# Altium PCB TXW827-RGB888_GQ_XC001 V2.0.PcbDoc (part 2 of 2)
Units mm, origin at the board's own origin, x right, y up, seen from the top; angles counter-clockwise.
Board outline 100 x 93.19 mm, 2 copper layers (Top Layer, Bottom Layer); 214 components, 136 nets, 624 pads, 441 vias.
Unrouted connection lines stored in the file: 170.
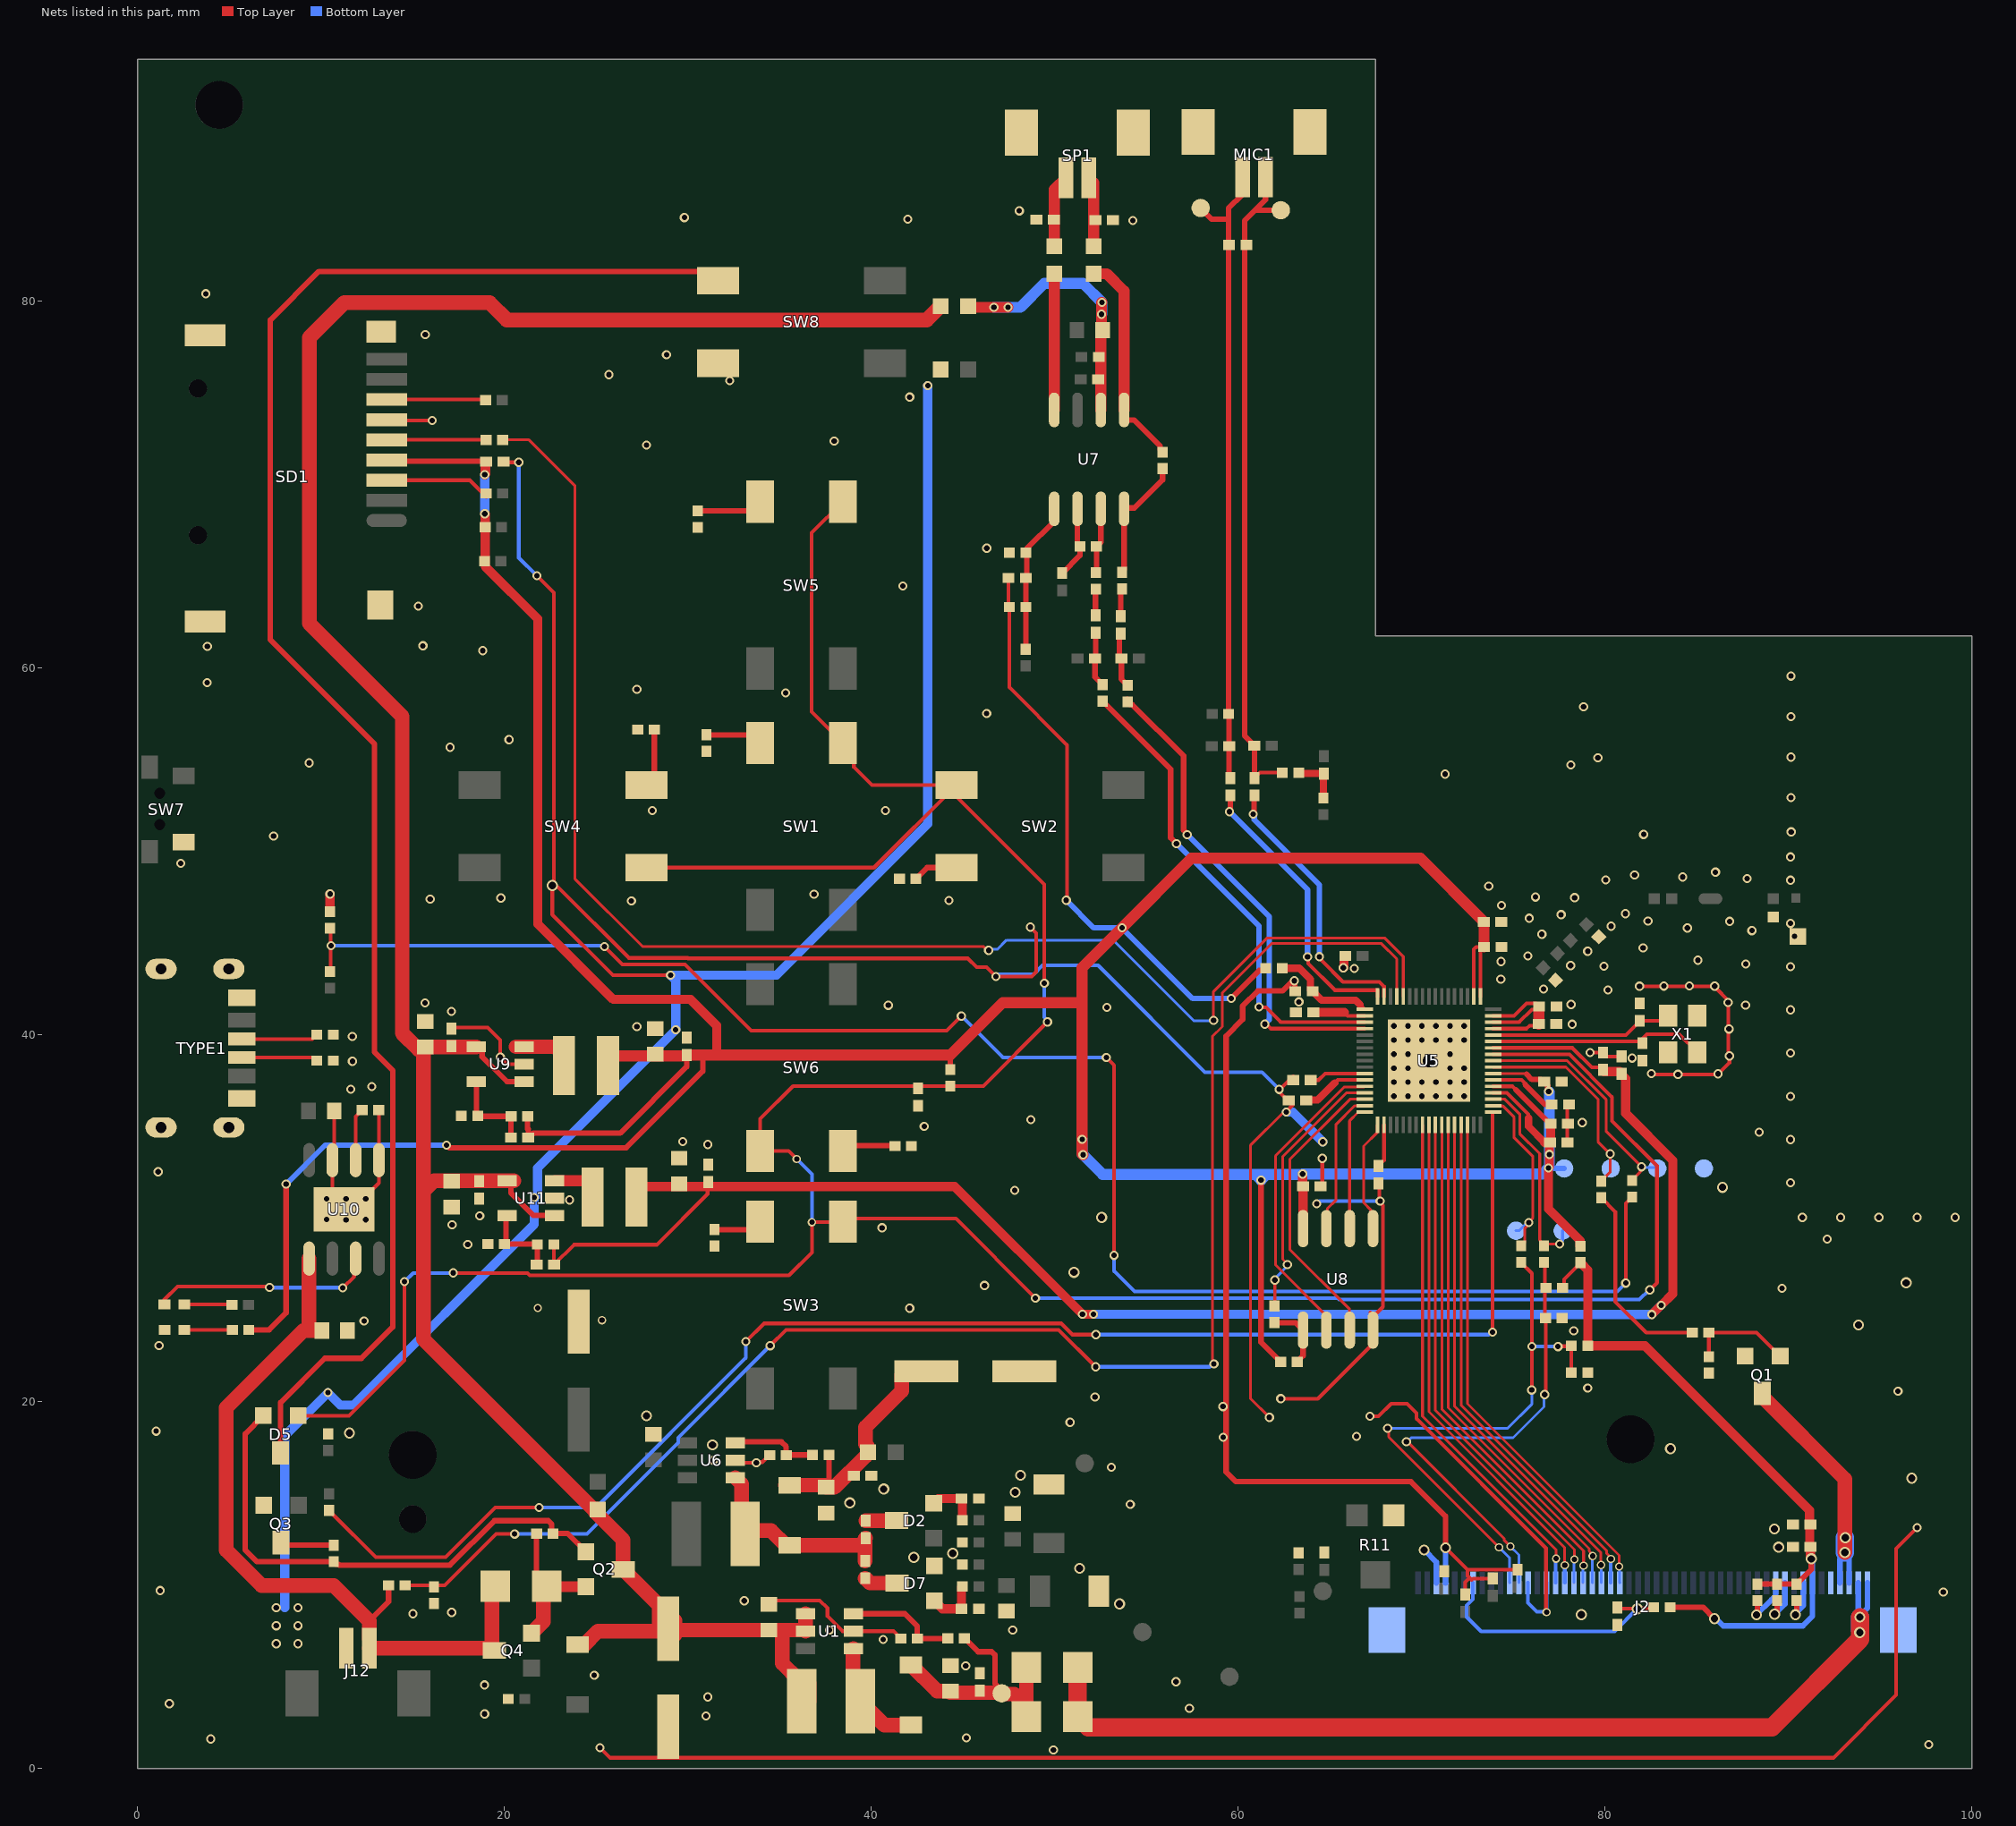
[diagram p2: the nets of this part, all layers, seen from the top]

## Via types
v1: diameter 0.5, hole 0.3, Top Layer to Bottom Layer, tented both sides, 376 vias
v2: diameter 0.6, hole 0.4, Top Layer to Bottom Layer, tented both sides, 42 vias
v3: diameter 0.45, hole 0.3, Top Layer to Bottom Layer, tented both sides, 23 vias

## Nets (pads, with @x,y where several pads share a name; then routed paths per layer and width w, separated by ;. In a path a pad name is that pad's centre, name@x,y a point inside that pad or via, vN(x,y) a via of type N, cw(c..) or ccw(c..) an arc to the next point about the centre after c; other vN are vias at no path point) (continued)
GND: C1.2 C2.1 C3.2 C5.2 C6.1 C8.2 C9.2 C10.2 C11.2 C12.2 C13.1 C14.2 C15.2 C17.1 C18.1 C19.2 C20.1 C21.2 C22.2 C23.2 C24.2 C25.2 C26.2 C27.2 C28.2 C29.2 C41.2 C45.2 C46.2 C47.2 C48.2 C49.2 C50.2 C51.2 C52.2 C53.2 C54.2 C55.2 C56.2 C57.2 C58.2 C59.2 C60.2 C61.1 C62.2 C64.1 C65.2 C66.1 C67.1 C68.2 C70.1 C71.2 C72.2 CB1.1 CB2.1 CC1.2 D6.2 D7.2 D8.1 J2.5 J2.36 J2.38 J2.47 J2.48 J2.51 J2.52 J10.1 J12.1 L4.1 L6.1 LED1.2 MIC1.3 MIC1.4 pad.2 Q1.2 Q3.2 R3.1 R6.2 R11.1 R18.2 R19.2 R23.1 R25.1 R27.1 R29.1 R30.1 R33.1 R35.1 R37.1 R40.1 R57.2 R58.1 R59.1 R61.1 R62.1 R64.1 R67.1 R68.1 R69.2 R71.1 R73.1 RF1.2 SD1.6 SD1.10 SD1.11 SD1.12 SD1.13 SP1.3 SP1.4 SW7.2 SW8.3 TYPE1.1 TYPE1.2 TYPE1.3 TYPE1.4 TYPE1.GND U1.2 U5.69 U6.2 U8.4 U9.2 U10.1 U10.3 U10.9 U11.2 X1.2 X1.4 | length 420.4
  Top Layer w0.15: v1(61.697,19.134) 60.655,20.176 60.655,33.958 62.479,35.782 v1(62.61,35.782)
  Top Layer w0.2: C66.1@10.711,35.85 10.711,33.257 U10.3@10.611,33.157 10.611,31.11 U10.9@11.246,30.475 11.711,30.475 12.357,31.121 12.357,31.136 12.796,31.575 12.811,31.575 13.151,31.915 U10.1@13.151,33.157 R61.1@13.151,35.885 ; SD1.6@14.09,73.503 14.099,73.494 v1(16.059,73.494) ; C62.2@17.035,40.389 19.082,40.389 19.769,39.703 v1(19.768,38.769) 20.145,38.393 U9.2@21.061,38.393 ; C61.1@19.922,71.198 19.936,71.213 v1(20.774,71.213) ; v1(21.763,65.023) 22.689,64.096 22.689,48.449 22.678,48.438 22.678,48.209 v2(22.602,48.132) ; v1(25.201,1.122) 25.752,0.572 92.448,0.572 95.869,3.994 95.869,11.985 v1(97.011,13.127) ; v1(29.046,43.246) 25.905,43.246 22.602,46.549 v2(22.602,48.132) ; U6.2@32.574,16.795 32.71,16.658 v1(33.728,16.658) 33.765,16.696 34.052,16.696 34.43,17.074 R25.1@34.455,17.074 ; C1.2@34.418,8.938 34.63,9.15 37.186,9.15 37.605,8.732 37.605,8.291 38.418,7.478 U1.2@39.017,7.478 41.198,7.478 R3.1@41.599,7.077 ; v1(48.665,45.866) 48.983,45.548 48.983,43.428 48.73,43.175 v1(46.787,43.175) 46.283,43.68 45.73,43.68 45.249,44.161 30.006,44.161 29.98,44.187 26.773,44.187 22.904,48.056 22.678,48.056 v2(22.602,48.132) ; v1(62.316,20.155) 64.336,20.155 67.31,23.128 U8.4@67.31,23.575 ; v1(62.61,35.782) 62.61,35.808 62.986,36.184 62.986,36.546 C54.2@62.962,36.57 ; C54.2@62.757,36.416 62.702,36.416 62.285,36.832 62.285,36.962 v1(62.228,37.02) 62.272,37.02 C53.2@62.993,37.74 ; C45.2@64.535,31.824 64.586,31.824 64.578,31.832 v1(64.578,33.259) ; v1(67.182,19.192) 67.648,19.192 68.336,19.88 69.208,19.88 69.719,19.369 69.719,19.064 76.774,12.008 76.774,8.547 v3(76.803,8.518) ; U8.4@67.207,24.862 U8.4@67.344,24.725 ; U8.4@67.344,24.624 67.881,25.161 67.881,30.696 67.688,30.89 67.688,31.852 C55.2@67.644,31.896 ; v2(71.298,12.026) 72.497,10.826 ; C26.2@72.372,9.476 72.372,10.151 72.61,10.389 ; C25.2@73.874,10.351 72.798,10.351 72.723,10.276 72.61,10.389 ; C24.2@75.222,10.826 72.497,10.826 ; R18.2@77.679,24.532 R18.2@77.698,24.55 ; C56.2@77.94,34.134 77.94,36.194 C58.2@78.086,36.194 ; v1(79.18,39.022) 79.673,39.022 C60.2@79.751,38.944 ; C60.2@79.881,39.035 80.101,38.815 CC1.2@80.897,38.815 ; v1(81.871,42.642) v1@85.97,42.642 ; v1@82.46,37.84 86.126,37.84 v1(86.151,37.865) ; v1(85.97,42.647) v1@85.97,42.642 ; v1@86.021,42.622 86.001,42.642 v1@85.97,42.642 ; v1@86.179,37.871 86.774,38.466 86.774,38.836 v1(86.778,38.84) ; v1@86.706,38.84 v1(86.706,41.756) ; v1@86.794,41.779 85.97,42.603 v1@85.97,42.642 ; 72.497,10.826 72.497,10.502 72.61,10.389
  Top Layer w0.3: v1@63.059,42.928 63.08,42.907 63.08,42.397 C51.2@63.101,42.376 ; v1(63.059,42.943) 63.021,42.905 62.935,42.905 62.415,42.385 61.059,42.385 60.24,41.567 60.24,40.833 59.334,39.927 59.334,16.16 59.863,15.631 69.415,15.631 71.291,13.755 71.291,12.032 v2(71.298,12.026)
  Top Layer w0.5: R64.1@10.484,46.71 v1(10.484,47.674) ; v1(65.729,43.647) 65.757,43.675 65.757,44.28 65.777,44.3 C50.2@65.832,44.3
  Bottom Layer w0.2: v1(20.774,71.213) 20.774,66.012 v1(21.763,65.023) ; v1(46.787,43.175) 46.914,43.302 48.857,43.302 49.33,43.775 52.36,43.775 58.175,37.959 61.288,37.959 v1(62.228,37.02) ; v1(64.277,30.781) 64.424,30.928 v1(67.731,30.928) ; J2.38@75.796,10.114 75.796,9.018 76.278,8.536 76.785,8.536 v3(76.803,8.518) 76.8,8.521 76.8,10.111 J2.36@76.797,10.114
  Bottom Layer w0.3: v2(70.131,11.907) 70.798,11.241 J2.48@70.798,10.114 ; J2.47@71.298,10.114 v2(71.298,12.026)
  Bottom Layer w0.5: 8.015,8.774 8.015,18.129 v1(10.37,20.484) 11.045,19.808 11.763,19.808 21.618,29.664 v1(21.618,31.129) 21.795,31.305 21.795,32.736 v1(29.331,40.272) 29.331,42.961 v1(29.046,43.246) 34.821,43.246 43.071,51.497 v1(43.071,75.389) ; v1(62.61,35.782) 62.979,35.782 v1(64.603,34.158)
  other v1: 49.92,0.996 97.645,1.288 3.978,1.601 45.176,1.66 30.978,2.857 18.914,2.966 57.335,3.275 1.721,3.527 31.074,3.895 18.909,4.544 56.602,4.718 24.891,5.076 45.136,5.583 7.555,6.792 8.732,6.792 40.645,7.03 37.719,7.544 47.702,7.542 7.555,7.775 8.732,7.775 15.009,8.429 17.113,8.499 7.555,8.757 8.732,8.757 33.067,9.137 98.436,9.614 1.226,9.691 54.11,14.394 53.08,16.416 31.387,16.792 59.176,18.046 66.45,18.104 1.006,18.385 50.827,18.864 59.166,19.725 52.189,20.241 95.967,20.567 79.049,20.737 1.162,23.046 78.29,23.854 12.34,24.394 42.086,25.088 89.636,26.169 46.162,26.326 17.992,28.56 92.105,28.86 40.579,29.473 17.136,29.636 11.359,29.911 12.428,29.919 10.29,29.934 90.754,30.035 92.836,30.035 94.919,30.035 97.001,30.035 99.084,30.035 18.646,30.121 23.54,30.988 10.29,31.05 11.359,31.05 12.428,31.05 47.81,31.51 90.108,31.925 1.116,32.528 31.084,34.013 29.712,34.168 90.108,34.282 88.401,34.685 42.876,34.999 78.748,35.209 48.684,35.367 68.479,36.646 69.245,36.646 70.011,36.646 70.777,36.646 71.543,36.646 72.309,36.646 90.108,36.639 11.609,37.031 12.766,37.17 68.479,37.412 69.245,37.412 70.011,37.412 70.777,37.412 71.543,37.412 72.309,37.412 83.972,37.838 82.519,37.88 68.479,38.178 69.245,38.178 71.543,38.178 72.309,38.178 11.704,38.551 81.473,38.727 68.479,38.944 69.245,38.944 71.543,38.944 90.108,38.996 68.479,39.71 69.245,39.71 70.011,39.71 70.777,39.71 71.543,39.71 72.309,39.71 11.702,39.902 86.751,40.312 27.209,40.442 68.479,40.476 69.245,40.476 70.011,40.476 70.777,40.476 71.543,40.476 72.309,40.476 78.196,40.57 17.101,41.265 90.108,41.353 52.838,41.491 40.918,41.605 87.652,41.617 78.143,41.649 15.665,41.737 63.307,41.79 80.153,42.442 76.64,42.487 83.2,42.653 84.596,42.666 74.314,43.026 66.319,43.618 90.108,43.711 79.938,43.736 78.116,43.769 87.664,43.857 74.32,43.989 85.061,44.06 75.789,44.292 79.049,44.548 82.068,44.734 90.317,45.367 76.55,45.479 88,45.677 84.479,45.82 80.327,45.92 90.108,46.068 82.338,46.194 86.793,46.181 75.864,46.351 77.6,46.546 81.103,46.603 74.349,47.046 26.915,47.3 44.22,47.317 15.947,47.388 19.798,47.456 78.334,47.473 76.203,47.506 36.873,47.656 73.653,48.095 90.108,48.425 80.033,48.443 87.744,48.513 84.229,48.602 81.601,48.705 86.015,48.864 2.343,49.348 90.099,49.693 7.41,50.831 82.097,50.923 90.144,51.058 28.049,52.225 40.765,52.225 90.133,52.925 71.281,54.213 78.126,54.705 9.35,54.82 79.607,55.105 90.133,55.136 17.03,55.67 20.242,56.091 90.133,57.346 46.28,57.512 78.827,57.886 35.325,58.642 27.213,58.828 3.781,59.204 90.133,59.557 18.807,60.944 3.794,61.171 15.549,61.206 15.294,63.366 41.709,64.465 46.285,66.528 27.733,72.15 37.967,72.373 42.085,74.767 32.274,75.662 25.692,75.991 28.827,77.079 15.674,78.176 3.717,80.401 54.252,84.396 41.984,84.461 29.802,84.556 48.061,84.922
  other v2: 78.702,8.377 53.525,8.966 51.349,10.901 42.306,11.499 44.429,11.72 89.461,12.057 89.228,13.046 38.825,14.471 47.836,15.046 40.671,15.226 96.715,15.819 48.126,15.973 83.561,17.425 31.338,17.636 11.543,18.278 27.734,19.218 93.807,24.172 96.411,26.471 51.044,27.045 52.55,30.036 86.401,31.679
  other v3: 25.309,24.433 21.806,25.098
L/R: J2.39 R14.2 R16.1 R18.1 | length 26.5
  Top Layer w0.15: v1(69.168,17.811) 69.209,17.811 74.503,12.517 74.503,12.427 v3(74.829,12.101)
  Top Layer w0.2: R16.1@76.664,27.588 76.711,27.541 R18.1@76.711,24.555 ; v1(76.699,20.376) 76.754,20.432 R18.1@76.754,24.555
  Bottom Layer w0.15: v1(69.168,17.811) 69.218,17.811 69.43,18.024 74.98,18.024 76.667,19.711 v1@76.667,20.366 ; v3(74.829,12.101) 75.299,11.631 J2.39@75.299,10.114
LCD_3V3: C11.1 C12.1 J2.7 R7.1 R8.1 R9.1 R10.1 R14.1 R15.1 R24.1 | length 40.5
  Top Layer w0.2: R14.1@77.678,26.195 77.761,26.278 77.761,26.653 R10.1@78.651,27.544
  Top Layer w0.3: R24.1@83.542,8.783 85.335,8.783 v2(85.955,8.163) ; R9.1@88.299,10.044 R8.1@89.369,10.044 R7.1@90.44,10.044 91.24,10.844 v2(91.24,11.421)
  Top Layer w0.5: R10.1@78.651,27.569 78.651,27.544 78.676,27.519 78.701,27.519 79.054,27.166 R15.1@79.054,23.041 82.165,23.041 91.143,14.063 91.143,13.105 91.159,13.089 C12.1@91.159,11.886 ; C12.1@91.188,12.077 91.188,11.472 v2(91.24,11.421)
  Bottom Layer w0.3: v2(85.955,8.163) 86.036,8.163 86.431,7.768 90.781,7.768 91.298,8.286 J2.7@91.298,10.114 91.298,11.362 v2(91.24,11.421)
LOUT_N: R38.2 U5.20 | length 26.3
  Top Layer w0.2: v1(61.131,41.52) 61.171,41.48 61.515,41.48 62.312,40.683 U5.20@66.894,40.683
  Top Layer w0.3: R38.2@52.603,58.184 52.603,58.159 52.728,58.034 52.753,58.034 56.311,54.476 56.311,50.735 v1(56.626,50.42)
  Bottom Layer w0.3: v1(56.626,50.42) 61.131,45.915 v1(61.131,41.52)
LOUT_P: R41.2 U5.21 | length 26.7
  Top Layer w0.2: v1(61.448,40.576) 61.529,40.576 61.772,40.333 U5.21@66.894,40.333
  Top Layer w0.3: R41.2@53.942,58.281 53.942,58.148 54.092,57.998 54.225,57.998 57.015,55.207 57.015,51.153 57.211,50.957 v1(57.211,50.903)
  Bottom Layer w0.3: v1(57.211,50.903) 57.228,50.903 61.681,46.449 61.681,40.809 v1(61.448,40.576) v1@61.448,40.59
MIC_N: C39.1 U5.17 | length 15.7
  Top Layer w0.2: v1(59.52,52.162) v1@59.568,52.21 ; v1(63.773,44.241) 63.804,44.21 63.804,43.888 65.264,42.428 67.589,42.428 67.594,42.423 U5.17@67.594,42.083
  Top Layer w0.3: v1@59.568,52.21 C39.1@59.568,53.047
  Bottom Layer w0.3: v1(59.52,52.162) 63.773,47.909 v1(63.773,44.241)
MIC_P: C33.1 U5.16 | length 15.1
  Top Layer w0.2: v1(60.815,52.024) v1@60.853,52.062 ; C33.1@60.853,53.009 C33.1@60.892,53.047 ; v1(64.423,44.253) 64.423,44.177 64.534,44.066 64.534,44.057 65.701,42.89 67.695,42.89 67.944,42.641 U5.16@67.944,42.083
  Top Layer w0.3: v1@60.853,52.062 C33.1@60.853,53.009
  Bottom Layer w0.3: v1(60.815,52.024) 60.872,51.967 60.872,51.719 64.423,48.168 v1(64.423,44.253)
NetC4_2: C4.2 D2.3 | length 1.7
  Top Layer w0.8: C4.2@39.691,13.498 41.348,13.498 D2.3@41.368,13.518
NetC5_1: C5.1 D2.2 R70.2 | length 2.8
  Top Layer w0.5: D2.2@43.4,14.458 43.651,14.709 C5.1@44.911,14.709 44.958,14.663 R70.2@44.958,13.52
NetC7_2: C7.2 D7.3 | length 1.9
  Top Layer w0.8: C7.2@39.659,10.364 39.923,10.1 D7.3@41.403,10.1
NetC8_1: C8.1 D7.1 R72.2 | length 2.9
  Top Layer w0.5: D7.1@43.435,9.135 43.874,8.696 C8.1@44.911,8.696 44.911,9.865 R72.2@44.958,9.912
NetC15_1: C15.1 C20.2 C21.1 D3.2 R20.1 R22.2 | length 13.4
  Top Layer w0.3: C20.2@37.689,15.322 R22.2@37.689,17.085
  Top Layer w0.8: D3.2@35.319,15.439 C20.2@37.522,15.439 ; C20.2@37.522,15.322 37.689,15.322 37.983,15.322 R20.1@39.671,17.01 ; R20.1@39.781,17.207 39.781,17.57 39.671,17.68 39.671,18.597 41.646,20.573 41.646,21.45 41.846,21.65 C15.1@42.996,21.65
NetC23_1: C23.1 J2.44 R24.2 | length 14.2
  Top Layer w0.2: C23.1@80.662,8.765 80.725,8.701 v2(81.751,8.701) 81.792,8.742 82.6,8.742 R24.2@82.642,8.783
  Bottom Layer w0.2: J2.44@72.797,10.114 72.797,9.219 72.451,8.873 72.451,8.257 73.238,7.47 80.52,7.47 v2(81.751,8.701)
NetC29_1: C29.1 L8.2 SP1.2 | length 4
  Top Layer w0.6: L8.2@49.975,82.996 49.975,86.095 SP1.2@50.601,86.72
NetC30_1: C30.1 R34.2 RR1.1 | length 2.7
  Top Layer w0.4: R34.2@63.297,54.288 63.344,54.24 C30.1@64.655,54.24 64.645,54.229 RR1.1@64.645,52.905
NetC31_1: C31.1 R36.2 U7.2 | length 4
  Top Layer w0.3: C31.1@50.4,65.17 51.368,66.138 R36.2@51.368,66.62 51.233,66.755 U7.2@51.233,68.67
NetC32_1: C32.1 C33.2 C35.2 M1.1 MIC1.1 R34.1 | length 36.2
  Top Layer w0.2: C33.2@60.892,53.997 61.182,54.288 R34.1@62.106,54.288
  Top Layer w0.3: C33.2@60.892,53.997 60.892,55.75 C32.1@60.874,55.768 60.819,55.768 60.699,55.888 60.699,55.943 60.342,56.3 60.342,83.063 60.342,84.388 60.91,84.956 ; MIC1.1@61.479,86.766 61.479,85.524 60.91,84.956 ; M1.1@62.316,84.956 60.91,84.956
NetC34_1: C34.1 R39.2 | length 1.4
  Top Layer w0.3: C34.1@52.215,62.873 52.215,64.238 R39.2@52.268,64.291
NetC34_2: C34.2 C43.1 R38.1 | length 3
  Top Layer w0.3: C43.1@52.185,60.512 52.185,59.502 R38.1@52.603,59.084 ; C34.2@52.215,61.923 52.22,61.919 C43.1@52.22,60.512
NetC35_1: C35.1 C39.2 C42.2 M2.1 MIC1.2 R44.2 | length 34.9
  Top Layer w0.3: M2.1@57.946,85.077 58.558,84.465 59.469,84.465 59.469,85.064 60.229,85.824 MIC1.2@60.229,86.766 ; R44.2@59.376,57.418 59.501,57.293 C42.2@59.501,55.74 59.501,54.064 C39.2@59.568,53.997 ; R44.2@59.474,57.491 59.474,84.465
NetC40_1: C40.1 R42.2 | length 1.5
  Top Layer w0.3: C40.1@53.596,62.813 53.596,64.235 R42.2@53.666,64.304
NetC40_2: C40.2 C44.1 R41.1 | length 3
  Top Layer w0.3: C44.1@53.527,60.512 53.527,61.794 C40.2@53.596,61.863 ; C44.1@53.63,60.512 53.63,59.385 R41.1@53.967,59.048
NetC41_1: C41.1 L9.2 SP1.1 | length 3.8
  Top Layer w0.6: SP1.1@51.851,86.72 52.114,86.457 L9.2@52.114,82.996
NetC63_2: C63.2 R55.2 R57.1 U9.5 | length 4.8
  Top Layer w0.3: U9.5@18.461,37.443 18.461,35.728 18.637,35.552 R55.2@20.355,35.552 C63.2@20.355,34.415
NetC69_2: C69.2 R66.2 R69.1 U11.5 | length 4.5
  Top Layer w0.3: U11.5@20.082,30.156 20.082,28.675 R69.1@19.995,28.588 21.763,28.588 R66.2@21.79,28.561 21.79,27.501 C69.2@21.746,27.456
NetCC2_2: CC2.2 R28.2 R29.2 R31.1 U7.1 | length 8.3
  Top Layer w0.3: R31.1@48.415,61.012 48.416,61.013 R28.2@48.416,63.319 CC2.2@48.417,64.903 ; CC2.2@48.463,64.912 48.463,66.286 48.463,66.491 49.963,67.991 U7.1@49.963,68.67
NetD1_1: D1.1 L1.2 U1.1 | length 6.2
  Top Layer w0.8: L1.2@39.002,3.655 39.002,6.513 U1.1@39.017,6.528 ; L1.2@39.402,3.655 40.693,2.363 D1.1@42.156,2.363
NetD5_3: D5.3 SW8.1 | length 94
  Top Layer w0.3: D5.3@7.789,17.195 7.789,19.942 10.2,22.353 12.196,22.353 13.902,24.059 13.902,38.058 12.9,39.06 12.9,55.865 7.232,61.532 7.232,78.974 9.874,81.615 31.136,81.615 SW8.1@31.64,81.112
NetJ2_8: J2.8 R7.2 | length 2.7
  Top Layer w0.3: v2(90.377,8.372) 90.44,8.434 R7.2@90.44,9.144
  Bottom Layer w0.3: v2(90.377,8.372) 90.377,8.453 90.798,8.874 J2.8@90.798,10.114
NetJ2_10: J2.10 R8.2 | length 2.7
  Top Layer w0.3: v2(89.24,8.403) 89.369,8.532 R8.2@89.369,9.144
  Bottom Layer w0.3: v2(89.24,8.403) 89.797,8.959 J2.10@89.797,10.114
NetJ2_11: J2.11 R9.2 | length 3
  Top Layer w0.3: v2(88.247,8.368) 88.299,8.421 R9.2@88.299,9.144
  Bottom Layer w0.3: v2(88.247,8.368) 89.067,9.189 89.073,9.189 89.297,9.413 J2.11@89.297,10.114
NetL8_1: L8.1 U7.8 | length 7.4
  Top Layer w0.6: U7.8@49.963,74.068 49.963,81.476 L8.1@49.975,81.489
NetL9_1: L9.1 R43.1 U7.5 | length 11.9
  Top Layer w0.3: U7.5@53.773,74.068 53.773,73.645 53.899,73.518 54.322,73.518 55.743,72.097 55.743,71.912 R43.1@55.868,71.787
  Top Layer w0.6: L9.1@52.114,81.489 52.829,81.489 53.773,80.546 U7.5@53.773,74.068
NetL10_1: L10.1 U9.3 | length 2.4
  Top Layer w0.8: U9.3@20.633,39.343 U9.3@21.061,39.343 22.773,39.343 L10.1@22.936,39.181
NetL11_1: L11.1 U11.3 | length 2.8
  Top Layer w0.6: U11.3@22.736,32.042 24.49,32.042 24.79,31.742 L11.1@24.79,31.148
NetLED1_1: LED1.1 R52.1 | length 2.6
  Top Layer w0.2: LED1.1@2.544,23.898 2.552,23.906 R52.1@5.157,23.906
NetLED2_1: LED2.1 R53.1 | length 2.6
  Top Layer w0.2: LED2.1@2.531,25.296 5.115,25.296 R53.1@5.145,25.266
NetQ1_1: Q1.1 R5.1 R6.1 | length 5.7
  Top Layer w0.2: R6.1@85.653,22.443 85.653,23.759 R5.1@85.649,23.762 88.251,23.762 Q1.1@89.539,22.475
NetQ3_3: Q3.3 RR2.2 | length 2.9
  Top Layer w0.3: Q3.3@7.806,12.305 7.945,12.167 RR2.2@10.685,12.167
NetR1_1: R1.1 R3.2 U1.3 | length 6.1
  Top Layer w0.3: U1.3@39.017,8.428 41.819,8.428 42.499,7.748 R3.2@42.499,7.077 44.16,7.077 R1.1@44.164,7.081
NetR22_1: R22.1 R25.2 U6.3 | length 4.8
  Top Layer w0.3: U6.3@32.574,17.745 32.627,17.799 35.095,17.799 35.355,17.539 R25.2@35.355,17.074 35.365,17.085 R22.1@36.789,17.085
NetR27_2: R27.2 SW1.3 | length 3.1
  Top Layer w0.3: R27.2@31.004,56.349 33.5,56.349 SW1.3@33.938,55.91
NetR30_2: R30.2 SW2.3 | length 2.5
  Top Layer w0.3: R30.2@42.423,48.496 43.038,49.111 SW2.3@44.64,49.111
NetR33_2: R33.2 SW3.3 | length 2.7
  Top Layer w0.3: R33.2@31.449,29.374 33.502,29.374 SW3.3@33.938,29.81
NetR35_2: R35.2 SW4.3 | length 3.2
  Top Layer w0.3: SW4.3@27.738,53.612 28.163,54.037 R35.2@28.163,56.635
NetR36_1: R36.1 R39.1 U7.3 | length 3.6
  Top Layer w0.3: R39.1@52.24,65.195 52.268,65.223 R36.1@52.268,66.62 52.503,66.855 U7.3@52.503,68.67
NetR37_2: R37.2 SW5.3 | length 3.6
  Top Layer w0.3: R37.2@30.535,68.564 33.442,68.564 SW5.3@33.938,69.06
NetR40_2: R40.2 SW6.3 | length 3
  Top Layer w0.3: SW6.3@38.439,33.662 38.734,33.957 41.266,33.957 R40.2@41.217,34.006
NetR42_1: R42.1 R43.2 U7.4 | length 6.9
  Top Layer w0.3: R42.1@53.6,65.191 53.773,65.364 U7.4@53.773,68.67 53.823,68.72 54.334,68.72 55.868,70.255 R43.2@55.868,70.863
NetR50_1: R50.1 R51.2 U8.1 | length 3.6
  Top Layer w0.3: R51.2@61.975,24.299 63.128,24.299 U8.1@63.534,23.893 63.534,22.493 R50.1@63.207,22.166
NetR59_2: R59.2 TYPE1.CC1 | length 4.2
  Top Layer w0.2: TYPE1.CC1@5.67,39.766 9.522,39.766 R59.2@9.761,40.005
NetR61_2: R61.2 U10.2 | length 2.9
  Top Layer w0.2: U10.2@11.881,33.157 11.881,35.535 R61.2@12.241,35.895
NetR62_2: R62.2 TYPE1.CC2 | length 4.2
  Top Layer w0.2: TYPE1.CC2@5.67,38.76 9.583,38.76 R62.2@9.761,38.583
PA5_PWR_ON/OFF: R65.1 U5.52 | length 82.6
  Top Layer w0.2: R65.1@10.427,14.064 10.427,14.039 10.602,13.864 10.627,13.864 12.972,11.519 16.777,11.519 19.483,14.225 v1(21.887,14.225) ; v1(33.156,23.266) 34.148,24.258 50.351,24.258 50.961,23.648 v1(52.24,23.648) ; v1(73.862,23.78) 73.862,35.778 73.867,35.783 U5.52@73.894,35.783
  Bottom Layer w0.2: v1(21.887,14.225) 21.895,14.217 24.992,14.217 33.156,22.381 v1(33.156,23.266) ; v1(52.24,23.648) 73.649,23.648 73.781,23.78 v1(73.862,23.78)
"PA9_ LCD_LED": R5.2 R12.1 | length 10.9
  Top Layer w0.2: R12.1@79.785,31.117 80.554,30.347 80.554,25.446 82.238,23.762 R5.2@84.75,23.762
PA9_TMS: J8.1 R12.2 U5.59 | length 11.4
  Top Layer w0.15: U5.59@73.894,38.233 77.863,38.233 79.607,36.488 79.607,34.167 v1(80.269,33.505) 80.269,32.501 R12.2@79.785,32.017
PA10_TCK: J9.1 R13.2 U5.60 | length 13.4
  Top Layer w0.15: U5.60@73.894,38.583 77.937,38.583 80.048,36.471 80.048,34.74 v1(81.988,32.8) 81.921,32.733 81.921,32.528 81.467,32.074 R13.2@81.467,32.049
  Bottom Layer w0.15: v1(81.988,32.8) 82.034,32.755 82.797,32.755 J9.1@82.843,32.709
PA10_USB_DET: R13.1 R56.1 R64.2 | length 93.1
  Top Layer w0.2: R56.1@10.484,43.442 10.51,43.468 10.51,44.826 v1(10.537,44.852) 10.51,44.879 10.51,45.783 R64.2@10.484,45.81 ; v1(25.444,44.808) 26.416,43.837 29.835,43.837 33.445,40.227 44.112,40.227 v1(44.902,41.017) ; v1(52.803,38.752) 53.222,38.333 v1(53.222,27.97) ; v1(81.122,26.458) 81.122,30.804 81.267,30.949 81.292,30.949 81.467,31.124 R13.1@81.467,31.149
  Bottom Layer w0.2: v1(10.537,44.852) 25.4,44.852 v1(25.444,44.808) ; v1(44.902,41.017) 47.166,38.752 v1(52.803,38.752) ; v1(53.222,27.97) 53.222,27.113 54.343,25.992 80.656,25.992 v1(81.122,26.458)
PA15_ADKEY: C28.1 D5.1 R26.1 SW1.1 SW2.1 SW3.1 SW4.1 SW5.1 SW6.1 U5.61 | length 184.3
  Top Layer w0.2: D5.1@8.754,19.227 11.523,19.227 14.539,22.243 v1(14.539,26.532) ; v1(17.206,27.01) 21.243,27.01 21.377,26.876 35.505,26.876 36.754,28.125 v3(36.754,29.775) 38.404,29.775 38.602,29.973 44.605,29.973 v1(48.94,25.639) ; SW4.1@27.738,49.111 40.139,49.111 SW2.1@44.64,53.612 ; v3(35.925,33.219) 35.482,33.662 SW6.1@33.938,33.662 33.938,35.408 35.726,37.196 46.098,37.196 v1(49.599,40.697) ; SW5.1@38.439,69.06 36.741,67.362 36.741,57.609 39.045,55.305 39.045,54.59 40.023,53.612 SW2.1@44.64,53.612 ; v1(49.428,42.806) 49.428,48.194 44.64,52.982 SW2.1@44.64,53.612 ; U5.61@73.894,38.933 78.046,38.933 80.381,36.598 80.381,35.295 82.824,32.853 82.824,26.476 v1(82.432,26.085)
  Bottom Layer w0.2: v1(14.539,26.532) 15.017,27.01 v1(17.206,27.01) ; v3(35.925,33.219) 36.754,32.391 v3(36.754,29.775) ; v1(48.94,25.639) 65.403,25.639 65.486,25.555 81.868,25.555 82.397,26.085 v1(82.432,26.085) ; v1(49.428,42.806) 49.428,40.949 49.599,40.778 v1(49.599,40.697)
PB6_BAT_ADC: R54.1 R58.2 U5.14 | length 84.4
  Top Layer w0.15: v1(58.671,22.049) 58.604,22.116 58.604,22.291 58.584,22.312 58.584,39.901 59.124,40.442 59.124,42.287 61.81,44.972 67.802,44.972 68.644,44.131 U5.14@68.644,42.083
  Top Layer w0.2: R54.1@14.579,9.971 16.746,9.971 19.549,12.775 v1(20.549,12.775) ; v1(34.482,23.043) 35.347,23.908 50.206,23.908 v1(52.223,21.892)
  Bottom Layer w0.2: v1@20.549,12.79 24.501,12.79 29.463,17.751 29.463,18.025 v1(34.482,23.043) ; v1(52.223,21.892) 58.433,21.892 58.59,22.049 v1(58.671,22.049)
PC6: R17.2 TX1.1 U5.53 | length 9.9
  Top Layer w0.15: U5.53@73.894,36.133 73.914,36.113 74.427,36.113 75.04,35.5 75.04,34.377 76.063,33.354 76.063,30.017 75.835,29.789 v1(75.835,29.754) ; R17.2@75.427,28.489 75.627,28.689 75.627,29.451 v1@75.835,29.66
  Bottom Layer w0.15: TX1.1@75.139,29.314 75.3,29.314 75.74,29.754 v1(75.835,29.754)
PC7: R16.2 RX1.1 U5.54 | length 11.2
  Top Layer w0.15: U5.54@73.894,36.483 74.53,36.483 75.34,35.673 75.34,34.605 76.433,33.512 76.433,28.801 76.464,28.77 76.464,28.688 R16.2@76.664,28.488 76.768,28.592 v1(77.515,28.592)
  Bottom Layer w0.15: v1(77.515,28.592) 77.679,28.756 RX1.1@77.679,29.314
QSPI_CLK: U5.34 U8.6 | length 7.1
  Top Layer w0.15: U8.6@66.066,29.261 66.066,35.304 66.519,35.756 66.519,35.763 66.539,35.783 U5.34@66.894,35.783
QSPI_CS: R51.1 U5.31 | length 14.5
  Top Layer w0.15: R51.1@61.975,25.206 61.994,25.225 v1(61.994,26.623) ; v1(62.68,27.468) 62.68,27.498 62.418,27.76 62.418,33.362 65.889,36.833 U5.31@66.894,36.833
  Bottom Layer w0.15: v1(61.994,26.623) 61.994,26.703 62.68,27.389 v1(62.68,27.468)
QSPI_HOLD: U5.33 U8.7 | length 7.9
  Top Layer w0.15: U8.7@64.804,29.429 64.863,29.487 64.863,30.525 65.329,30.991 65.329,35.116 66.338,36.125 66.886,36.125 U5.33@66.894,36.133
QSPI_MISO: U5.30 U8.2 | length 17.1
  Top Layer w0.15: U8.2@64.804,23.893 64.804,24.673 62.031,27.445 62.031,33.399 65.79,37.158 66.869,37.158 U5.30@66.894,37.183
QSPI_MOSI: U5.35 U8.5 | length 6.2
  Top Layer w0.15: U8.5@67.344,29.429 67.344,30.274 67.219,30.399 67.219,30.458 66.835,30.842 66.835,33.927 67.574,34.666 67.574,35.063 U5.35@67.594,35.083
QSPI_WP: U5.32 U8.3 | length 16.1
  Top Layer w0.15: U8.3@66.074,23.893 66.063,23.904 66.063,25.037 62.804,28.296 62.804,33.199 66.088,36.483 U5.32@66.894,36.483
R0: J2.35 U5.42 | length 28
  Top Layer w0.15: U5.42@70.044,35.083 70.044,19.199 77.32,11.922 v3(77.32,11.433)
  Bottom Layer w0.2: J2.35@77.298,10.114 77.309,10.125 77.309,11.421 v3(77.32,11.433)
R1: J2.34 U5.43 | length 28
  Top Layer w0.15: U5.43@70.394,35.083 70.394,19.438 77.78,12.052 77.78,11.088 v3(77.798,11.07)
  Bottom Layer w0.2: J2.34@77.798,10.114 v3(77.798,11.07)
R2: J2.33 U5.44 | length 28.1
  Top Layer w0.15: U5.44@70.744,35.083 70.744,19.512 78.327,11.93 v3(78.327,11.391)
  Bottom Layer w0.15: J2.33@78.298,10.114 78.298,11.362 v3(78.327,11.391)
R3: J2.32 U5.45 | length 28.2
  Top Layer w0.15: U5.45@71.094,35.083 71.094,19.587 78.825,11.856 v3(78.825,11.056)
  Bottom Layer w0.15: J2.32@78.796,10.114 78.796,11.028 v3(78.825,11.056)
R4: J2.31 U5.46 | length 28.2
  Top Layer w0.15: U5.46@71.444,35.083 71.444,19.661 79.125,11.98 79.125,11.849 79.316,11.657 v3(79.316,11.576)
  Bottom Layer w0.15: J2.31@79.297,10.114 79.309,10.127 79.309,11.569 v3(79.316,11.576)
R5: J2.30 U5.47 | length 28.3
  Top Layer w0.15: U5.47@71.794,35.083 71.794,19.735 79.772,11.757 v3(79.772,11.086)
  Bottom Layer w0.15: v3(79.772,11.086) 79.797,11.061 J2.30@79.797,10.114
R6: J2.29 U5.48 | length 28.4
  Top Layer w0.15: U5.48@72.144,35.083 72.144,19.809 80.072,11.881 80.072,11.732 80.313,11.491 v3(80.313,11.41)
  Bottom Layer w0.2: J2.29@80.297,10.114 80.294,10.117 80.294,11.391 v3(80.313,11.41)
R7: J2.28 U5.49 | length 28.4
  Top Layer w0.15: U5.49@72.494,35.083 72.494,19.884 80.767,11.61 80.767,11.006 v3(80.769,11.004)
  Bottom Layer w0.15: v3(80.769,11.004) 80.783,10.99 80.783,10.128 J2.28@80.798,10.114
RED: LED2.2 U10.7 | length 12.2
  Top Layer w0.2: LED2.2@1.455,25.296 1.455,25.566 2.166,26.276 7.136,26.276 v1(7.185,26.227) ; v1(11.174,26.192) 11.799,26.817 11.799,27.71 U10.7@11.881,27.792
  Bottom Layer w0.2: v1(7.185,26.227) 7.202,26.21 11.157,26.21 v1(11.174,26.192)
S_CLK: R49.1 U5.13 | length 80.6
  Top Layer w0.15: R49.1@19.895,72.434 21.331,72.434 23.844,69.92 23.844,48.485 27.517,44.812 46.09,44.812 46.301,44.601 v1(46.389,44.601) ; v1(58.649,40.777) 58.649,42.348 61.581,45.28 67.973,45.28 68.994,44.259 U5.13@68.994,42.083
  Bottom Layer w0.15: v1(46.389,44.601) 46.442,44.654 46.864,44.654 47.363,45.154 53.177,45.154 57.563,40.768 58.641,40.768 v1(58.649,40.777)
SD_CLK: R49.2 SD1.5 | length 5.4
  Top Layer w0.2: SD1.5@13.576,72.434 R49.2@18.995,72.434
SD_CMD: R47.2 SD1.3 | length 5.8
  Top Layer w0.2: SD1.3@13.576,70.234 18.097,70.234 R47.2@19.008,69.323
SD_D0: R48.2 SD1.7 | length 5.4
  Top Layer w0.2: SD1.7@13.576,74.634 18.805,74.634 R48.2@18.895,74.545
SYS_EN: D5.2 Q2.1 R60.2 RR2.1 | length 28.6
  Top Layer w0.3: D5.2@6.849,19.227 5.859,18.237 5.859,11.903 6.495,11.267 RR2.1@10.685,11.267 10.685,11.242 10.81,11.117 10.949,11.117 10.986,11.081 17.029,11.081 19.449,13.501 22.382,13.501 22.558,13.326 22.558,12.886 R60.2@22.644,12.8 23.444,12.8 Q2.1@24.433,11.811
U/D: J2.40 R15.2 R17.1 R19.1 | length 31.2
  Top Layer w0.15: v1(68.139,18.541) 68.202,18.478 68.202,18.066 v3(74.216,12.051)
  Top Layer w0.2: R17.1@75.427,27.589 75.427,27.564 76.001,26.99 v1(76.001,22.996) 75.999,22.994 75.999,20.63 v1(75.997,20.628) ; v1(77.428,22.994) 77.445,23.012 R15.2@78.166,23.012 ; R19.1@78.154,21.576 78.154,22.971 R15.2@78.177,22.994
  Bottom Layer w0.15: v1(68.139,18.541) 74.684,18.541 75.992,19.849 ; v3(74.216,12.051) 74.788,11.479 74.788,10.124 J2.40@74.798,10.114 ; 75.997,19.849 v1(75.997,20.628)
  Bottom Layer w0.2: v1(76.001,22.996) v1(76.001,22.996) 77.427,22.995 v1(77.428,22.994)
VBAT: C67.2 J12.2 Q4.3 R54.2 R63.1 U10.5 | length 42.3
  Top Layer w0.3: J12.2@12.623,6.55 J12.2@12.623,7.063 ; 12.623,8.029 13.679,9.085 R54.2@13.679,9.971
  Top Layer w0.8: 9.341,23.873 U10.5@9.341,27.792 ; C67.2@10.037,23.868 9.031,23.868 4.821,19.659 4.821,11.899 6.756,9.964 10.688,9.964 12.623,8.029 J12.2@12.623,7.063 ; J12.2@12.623,6.55 19.142,6.55 19.263,6.429 Q4.3@19.441,6.429 ; Q4.3@19.249,6.429 19.306,6.487 R63.1@19.306,9.915
VCAM: C58.1 U5.57 | length 3.8
  Top Layer w0.2: U5.57@73.894,37.533 75.443,37.533 75.661,37.315
  Top Layer w0.3: 75.638,37.291 76.734,36.194 C58.1@77.081,36.194
VCAM_2: C53.1 U5.28 | length 3.1
  Top Layer w0.2: C53.1@63.943,37.527 64.373,37.527 64.728,37.883 U5.28@66.894,37.883
VCC5: C4.1 C7.1 D3.1 L5.2 U6.1 | length 10.8
  Top Layer w0.8: U6.1@32.574,15.845 32.921,15.498 32.921,12.957 34.531,12.957 D3.1@35.319,12.169 ; D3.1@35.549,12.163 39.306,12.163 ; C7.1@39.659,11.314 39.659,12.516 C4.1@39.691,12.548
VCC18: C54.1 U5.29 | length 3.6
  Top Layer w0.2: 65.26,37.373 65.42,37.533 U5.29@66.894,37.533
  Top Layer w0.4: C54.1@63.73,36.409 63.761,36.44 64.327,36.44 65.26,37.373
VCC_3V3: C45.1 C48.1 C49.1 C56.1 C57.1 C59.1 C61.2 C63.1 C64.2 C65.1 CC2.1 J11.1 L10.2 R10.2 R26.2 R28.1 R32.1 R45.1 R46.1 R50.2 R52.2 R55.1 SD1.4 U5.1 U5.2 U5.55 U5.56 U5.58 U8.8 | length 263
  Top Layer w0.15: U5.58@73.894,37.883 75.682,37.883 75.707,37.858 ; v1@76.869,36.963 v1(76.92,36.913)
  Top Layer w0.2: CC2.1@47.467,64.903 47.467,63.319 R28.1@47.516,63.319 47.516,58.943 50.667,55.793 50.667,47.376 v1(50.622,47.331) ; U5.2@72.844,42.083 72.844,44.659 72.97,44.785 C49.1@73.396,44.785 73.194,44.582 U5.1@73.194,42.083 ; U5.55@73.894,36.833 74.639,36.833 75.815,35.657 75.815,35.457 ; U5.56@73.894,37.183 74.947,37.183 75.125,37.004 ; C56.1@76.98,34.134 C56.1@76.99,34.134
  Top Layer w0.3: R52.2@6.057,23.906 7.165,23.906 8.092,24.833 v1(8.092,31.853) ; SD1.4@13.576,71.334 13.635,71.276 C61.2@18.991,71.276 ; v1(16.831,33.977) 16.977,33.832 26.627,33.832 30.804,38.009 30.804,38.83 30.743,38.891 ; C61.2@18.955,71.219 C61.2@18.991,71.256 ; R55.1@21.255,35.552 21.255,34.851 21.266,34.839 ; 21.292,34.851 C63.1@21.292,34.402 21.347,34.402 21.577,34.631 26.305,34.631 29.924,38.251 29.924,38.85 C65.1@29.924,38.891 ; R26.2@44.301,38.096 44.301,38.891 ; v1(59.612,41.974) 61.142,43.504 61.37,43.504 R32.1@61.495,43.629 ; v1(61.24,32.067) 61.24,23.233 R50.2@62.307,22.166 ; 75.125,37.004 76.974,35.155 C57.1@77.028,35.155 ; 75.707,37.858 76.004,37.561 76.493,37.561 C59.1@76.706,37.348 ; v1@76.869,36.963 C59.1@76.869,37.208
  Top Layer w0.4: 75.815,35.457 75.823,35.45 75.823,35.003 C56.1@76.693,34.134
  Top Layer w0.5: v1(18.918,68.403) 18.938,68.383 R46.1@18.938,67.678 18.938,65.826 18.953,65.812 18.953,65.523 21.809,62.668 21.809,46.044 25.928,41.925 30.14,41.925 31.562,40.503 31.562,38.891 ; v1(63.509,32.401) 63.509,31.745 63.529,31.725 63.534,31.725 U8.8@63.534,29.429 ; C56.1@76.693,34.134 76.98,34.134 76.96,34.114 v1(76.96,33.473) 76.96,32.784 v1(76.908,32.732) 76.908,30.499 78.626,28.78 78.626,28.494 R10.2@78.651,28.469 ; C56.1@76.99,34.134 77.028,34.134 C57.1@77.028,35.155
  Top Layer w0.53: v1(18.918,70.546) 18.955,70.582 C61.2@18.955,71.219
  Top Layer w0.6: L10.2@25.64,38.319 25.64,38.55 25.94,38.85 C65.1@29.924,38.85 ; C65.1@29.924,38.891 30.743,38.891 31.562,38.891 44.301,38.891 47.157,41.748 51.487,41.748 ; v1(51.535,33.452) 51.487,33.501 v1(51.487,34.3) 51.487,41.748 ; C49.1@73.396,44.785 73.396,46.154 69.929,49.621 57.451,49.621 v1(53.66,45.829) 51.487,43.656 51.487,41.748
  Bottom Layer w0.3: v1(8.092,31.853) 10.217,33.977 v1(16.831,33.977) ; v1(50.622,47.331) 52.124,45.829 v1(53.66,45.829) 57.515,41.974 v1(59.612,41.974) ; v1(76.908,32.732) 76.931,32.709 J11.1@77.763,32.709
  Bottom Layer w0.5: v1(18.918,68.403) v1(18.918,70.546)
  Bottom Layer w0.6: v1(51.487,34.3) 51.487,33.501 v1(51.535,33.452) 52.608,32.379 60.928,32.379 ; v1@63.487,32.379 61.552,32.379 ; v1(63.509,32.401) 76.577,32.401 v1(76.908,32.732) 76.96,32.784 v1(76.96,33.473) v1@76.96,36.872 ; 60.928,32.379 61.552,32.379 ; 60.928,32.379 v1(61.24,32.067) 61.552,32.379
VCC_FLS: C55.1 U5.36 | length 2.4
  Top Layer w0.2: C55.1@67.644,32.846 67.944,33.145 U5.36@67.944,35.083
VCC_PA: C36.1 C37.1 C38.1 L7.2 U7.6 | length 15.6
  Top Layer w0.6: L7.2@45.291,79.666 v1(46.676,79.666) v1(47.441,79.666) ; U7.6@52.503,74.068 52.503,78.417 52.545,78.459 52.545,79.915 v1(52.563,79.933)
  Bottom Layer w0.6: v1(46.676,79.666) 48.122,79.666 49.42,80.964 51.532,80.964 v1(52.563,79.933) 52.563,79.3 v1(52.545,79.282)
VCC_SYS: Q2.2 Q4.2 R60.1 R63.2 | length 8.1
  Top Layer w0.3: R60.1@21.744,12.8 21.744,10.277 22.106,9.915 R63.2@22.115,9.906
  Top Layer w0.6: R63.2@22.115,9.906 Q2.2@24.433,9.906
  Top Layer w0.8: Q4.2@21.473,7.369 22.106,8.002 R63.2@22.106,9.885
VCCAU33: C51.1 R32.2 U5.18 | length 5.7
  Top Layer w0.2: 66.635,41.642 U5.18@66.894,41.383
  Top Layer w0.4: R32.2@62.395,43.629 63.325,43.629 63.926,43.028 63.926,42.446 63.996,42.376 C51.1@64.051,42.376 ; C51.1@64.106,42.376 64.176,42.306 64.176,42.251 64.549,41.878 66.399,41.878 66.635,41.642
VCMAU: C52.1 U5.19 | length 2.9
  Top Layer w0.2: 65.773,41.219 65.96,41.033 U5.19@66.894,41.033
  Top Layer w0.5: C52.1@64.097,41.219 65.773,41.219
VDD1V15: C60.1 C69.1 C70.2 C71.1 CC1.1 L11.2 R66.1 U5.62 | length 94.1
  Top Layer w0.2: R66.1@22.69,28.561 22.69,27.462 23.777,28.549 28.293,28.549 31.066,31.322 31.066,31.726 C71.1@31.066,32.056 ; U5.62@73.894,39.283 78.212,39.283 79.278,38.217 79.825,38.217 C60.1@79.954,38.088
  Top Layer w0.5: C69.1@22.69,27.462 C69.1@22.696,27.456 ; L11.2@27.19,31.148 27.19,31.376 27.54,31.726 29.518,31.726 31.066,31.726 44.54,31.726 51.509,24.757 v1(52.098,24.757) ; C60.1@79.943,37.992 80.771,37.992 80.822,37.94 80.877,37.94 80.897,37.92 80.897,37.81 81.114,37.594 81.114,35.719 83.684,33.148 83.684,25.872 v1(83.058,25.245) 83.046,25.245 v1(82.542,24.74)
  Bottom Layer w0.5: v1(51.504,24.762) 51.509,24.757 67.311,24.757 67.328,24.74 v1(82.542,24.74) 83.046,25.245 v1(83.058,25.245)
VDD15: C46.1 C47.1 U5.65 U5.66 U5.67 | length 9.1
  Top Layer w0.2: U5.65@73.894,40.333 75.715,40.333 75.879,40.497 76.303,40.497 C46.1@76.387,40.581 ; U5.66@73.894,40.683 75.31,40.683 76.001,41.373 76.226,41.373 C47.1@76.396,41.543 76.24,41.7 75.709,41.7 75.038,41.028 73.899,41.028 U5.67@73.894,41.033
  Top Layer w0.6: C47.1@76.355,41.355 76.387,41.323 C46.1@76.387,40.581
VH: C2.2 C3.1 D1.2 J1.1 R1.2 R2.1 R4.1 | length 14.1
  Top Layer w0.3: R1.2@45.064,7.081 45.089,7.081 45.812,6.358 46.556,6.358 46.732,6.182 46.732,4.616 47.1,4.248 J1.1@47.1,4.125
  Top Layer w0.8: D1.2@42.156,5.633 43.587,4.202 C2.2@44.312,4.202 ; C2.2@44.294,4.125 45.915,4.125 J1.1@47.1,4.125 ; J1.1@47.1,4.09 47.138,4.052 47.788,4.052 R2.1@48.447,3.392 ; R2.1@48.447,2.821 R2.1@48.447,3.392 ; R4.1@48.447,5.503 R2.1@48.447,3.392
VIN: C1.1 C14.1 C62.1 C68.1 CB1.2 CB2.2 D4.2 L1.1 L7.1 Q2.3 R74.1 U1.4 U1.5 U9.1 U9.4 U11.1 U11.4 | length 149.4
  Top Layer w0.3: U9.4@18.461,39.343 18.461,39.338 18.63,39.338 18.775,39.193 18.775,38.795 20.127,37.443 U9.1@21.061,37.443 ; U11.4@20.346,31.876 20.346,31.372 21.576,30.142 U11.1@22.736,30.142
  Top Layer w0.8: CB1.2@15.309,39.191 14.422,40.079 14.422,57.358 9.35,62.43 9.35,78.006 11.252,79.908 19.192,79.908 20.124,78.976 43.019,78.976 L7.1@43.772,79.729 ; 15.571,31.465 15.571,39.227 CB1.2@15.671,39.327 ; CB1.2@15.829,39.338 17.106,39.338 U9.4@18.461,39.338 ; U11.4@20.514,32.042 U11.4@20.136,32.042 18.607,32.042 17.117,32.042 16.156,32.042 15.579,31.465 15.579,23.395 24.828,14.146 25.047,14.146 R74.1@25.079,14.114 ; D4.2@24.318,6.712 25.091,7.485 C14.1@28.44,7.485 ; R74.1@24.942,13.977 26.465,12.454 Q2.3@26.465,10.846 28.44,8.871 C14.1@28.44,7.485 ; C14.1@28.454,8.885 29.287,8.052 C14.1@29.287,7.538 ; C14.1@29.287,7.284 C14.1@29.287,7.538 ; U1.5@36.417,7.478 U1.5@36.417,7.538 ; U1.4@36.417,8.428 U1.5@36.417,7.538 ; U1.5@36.492,7.538 U1.5@36.417,7.538 ; L1.1@36.602,3.655 36.602,4.655 36.402,4.855 36.001,4.855 35.14,5.717 35.14,7.538 ; C14.1@28.44,7.485 28.935,7.485 28.987,7.538 C14.1@29.287,7.538 ; C14.1@29.287,7.538 C1.1@34.418,7.538 35.14,7.538 ; 35.14,7.538 U1.5@36.417,7.538
VLED+: J2.1 J2.2 R2.2 R4.2 | length 53.3
  Top Layer w1: R4.2@51.247,5.503 R2.2@51.247,2.821 51.832,2.235 89.097,2.235 93.888,7.025 v2(93.888,8.241)
  Bottom Layer w0.3: J2.2@93.797,10.114 93.797,8.412 v2@93.888,8.322 ; v2(93.888,8.241) v2@93.888,8.322 ; J2.1@94.298,10.114 94.298,8.732 v2@93.888,8.322
  Bottom Layer w1: v2@93.888,7.562 v2(93.888,8.241)
  other v2: 93.878,7.406
VLED-: J2.3 J2.4 Q1.3 | length 14.8
  Top Layer w0.8: Q1.3@88.573,20.443 88.573,20.265 93.068,15.771 v2(93.068,11.766)
  Bottom Layer w0.3: J2.4@92.797,10.114 92.797,11.414 v2@93.068,11.685 ; v2(93.068,11.766) v2@93.068,11.685 ; J2.3@93.297,10.114 93.297,11.455 v2@93.068,11.685
  Bottom Layer w1: v2(93.068,11.766) v2@93.068,12.564
  other v2: 93.095,12.575
XI: C10.1 U5.63 X1.1 | length 11.9
  Top Layer w0.2: U5.63@73.894,39.633 81.941,39.633 C10.1@82.032,39.541 ; C10.1@81.876,39.633 82.273,40.03 84.041,40.03 X1.1@85.025,39.046
XO: C9.1 U5.64 X1.3 | length 10.1
  Top Layer w0.2: U5.64@73.894,39.983 81.132,39.983 C9.1@81.886,40.736 ; C9.1@81.794,40.752 83.13,40.752 X1.3@83.425,41.046
pads on no net: J2.45 J2.49 J2.50 J12.3 J12.4 R11.3 SD1.1 SD1.2 SD1.8 SD1.9 SD1.14 SD1.15 SW1.2 SW1.4 SW2.2 SW2.4 SW3.2 SW3.4 SW4.2 SW4.4 SW5.2 SW5.4 SW6.2 SW6.4 SW7.0 SW7.3 SW7.4 SW8.2 SW8.4 U1.6 U6.6 U10.6

## Polygon pours and split planes (outlines as drawn)
GND on Top Layer "" (solid, remove dead copper, pour order 28): -5.6,102.958 -5.6,-6.443 114.604,-6.443 114.604,102.958
VIN on Top Layer "NONET_L-01_P-001" (solid, remove dead copper, pour order 26): 23.229,7.166 24.324,8.261 26.682,8.261 27.3,8.879 27.3,9.834 29.252,9.834 31.035,8.05 31.035,5.93 30.263,5.158 28.521,5.158 27.595,6.085 23.495,6.085 23.242,6.337
VCC_3V3 on Top Layer "NONET_L-01_P-001" (hatched Horizontal grid 0 track 0.01, remove dead copper, pour order 23): 51.554,42.957 50.505,41.908 50.505,41.901 51.524,40.882 51.554,40.882
MIC_N on Top Layer "NONET_L-01_P-001" (hatched Horizontal grid 0 track 0.01, remove dead copper, pour order 19): 67.594,41.796 66.927,42.464 67.552,42.464 67.594,42.423
VCCAU33 on Top Layer "NONET_L-01_P-001" (hatched Horizontal grid 0 track 0.01, remove dead copper, pour order 18): 66.399,41.878 66.751,41.878 67.177,41.452 67.177,41.373 66.527,41.373 66.527,41.405 66.076,41.855
QSPI_CLK on Top Layer "NONET_L-01_P-001" (hatched Horizontal grid 0 track 0.01, remove dead copper, pour order 17): 66.539,35.783 66.542,35.78 67.128,35.78 66.68,35.332 66.392,35.332 66.102,35.042 66.075,35.042 66.075,35.295 66.066,35.304
QSPI_MOSI on Top Layer "NONET_L-01_P-001" (hatched Horizontal grid 0 track 0.01, remove dead copper, pour order 16): 67.561,35.394 67.204,35.038 67.204,34.297 67.574,34.666
DE on Top Layer "NONET_L-01_P-001" (hatched Horizontal grid 0 track 0.01, remove dead copper, pour order 15): 73.2,35.317 73.445,35.071 73.445,34.559 73.231,34.344
PA5_PWR_ON/OFF on Top Layer "NONET_L-01_P-001" (hatched Horizontal grid 0 track 0.01, remove dead copper, pour order 14): 73.634,35.812 74.183,35.812 74.223,35.773 73.88,35.429 73.842,35.429 73.607,35.664 73.607,35.76
VCC_3V3 on Top Layer "NONET_L-01_P-001" (hatched Horizontal grid 0 track 0.01, remove dead copper, pour order 13): 73.194,42.083 73.477,42.366 73.477,44.704 73.194,44.785
VCC_3V3 on Top Layer "NONET_L-01_P-001" (hatched Horizontal grid 0 track 0.01, remove dead copper, pour order 9): 30.743,38.891 31.613,39.761 31.613,39.767 32.316,39.064 32.316,38.85
AGND on Top Layer "NONET_L-01_P-001" (solid, remove dead copper, pour order 0): 56.008,49.211 55.391,49.828 55.391,52.804 48.917,59.277 48.917,67.223 44.779,71.361 44.779,81.805 46.836,83.862 61.922,83.862 62.381,83.403 62.381,58.548 63.292,57.637 65.671,57.637 67.493,55.814 67.493,51.582 67.249,51.436 65.929,50.645 58.116,50.645 56.683,49.212 56.004,49.212
GND on Bottom Layer "NONET_L-01_P-001" (solid, remove dead copper, pour order 27): -11.479,100.387 -11.479,-9.014 108.724,-9.014 108.724,100.387
PC7 on Bottom Layer "NONET_L-01_P-001" (solid, remove dead copper, pour order 7): 78.028,28.292 78.551,28.815 78.551,29.692 78.001,30.242 77.204,30.242 76.882,29.919 76.882,28.778 77.367,28.292
PC6 on Bottom Layer "NONET_L-01_P-001" (solid, remove dead copper, pour order 6): 74.964,30.379 74.441,29.856 74.441,28.979 74.99,28.429 75.788,28.429 76.11,28.752 76.11,29.893 75.624,30.379
VCC_3V3 on Bottom Layer "NONET_L-01_P-001" (solid, remove dead copper, pour order 5): 76.727,32.295 77.117,32.067 78.109,32.067 78.446,32.404 78.446,32.989 77.689,33.747 76.727,33.747
PA9_TMS on Bottom Layer "NONET_L-01_P-001" (solid, remove dead copper, pour order 4): 80.181,34.257 79.636,33.712 79.636,32.505 80.008,32.133 80.925,32.133 81.023,32.231 81.023,33.85 80.616,34.257
PA10_TCK on Bottom Layer "NONET_L-01_P-001" (solid, remove dead copper, pour order 3): 82.242,33.42 81.766,32.945 81.766,32.564 82.295,32.035 83.203,32.035 83.44,32.272 83.44,33.191 83.211,33.42
AGND on Bottom Layer "NONET_L-01_P-001" (solid, remove dead copper, pour order 2): 55.932,49.912 59.663,46.181 59.663,40.546 60.576,39.633 62.521,39.633 62.552,39.601 62.826,39.875 62.826,42.076 62.409,42.493 62.409,47.374 57.895,51.889 57.486,51.889
AGND on Bottom Layer "NONET_L-01_P-001" (solid, remove dead copper, pour order 1): 61.78,43.464 55.404,49.841 55.404,52.816 48.93,59.29 48.93,67.236 44.779,71.386 44.779,81.769 46.872,83.861 61.907,83.861 62.394,83.374 62.394,58.56 63.305,57.649 65.684,57.649 67.506,55.827 67.506,45.303 64.438,43.464

## Keep-outs
Keep-Out Layer:
  lines w0.1: 99.978,61.739 67.472,61.739 67.472,93.191 0,93.191 0,0 100,0 100,61.739

## Other copper
Top Layer:
  rectangle net PA15_ADKEY: 36.55,28.593 39.549,30.897
  rectangle net PA15_ADKEY: 32.936,32.805 36.34,35.43
  rectangle net PA15_ADKEY: 36.741,54.101 39.534,57.609
  rectangle net PA15_ADKEY: 42.396,52.095 46.033,55.083
  rectangle net AVDD: 23.658,17.116 25.419,20.539
  rectangle net VDD15: 75.655,40.316 76.684,41.7
Bottom Layer:
  rectangle net VLED+: 93.736,8.024 94.333,10.709
  rectangle net VLED-: 92.737,9.543 93.412,12.2
  rectangle net VLED-: 92.773,11.608 93.412,12.877
  rectangle net VLED+: 93.488,7.235 94.154,8.49
Multi-Layer:
  pour cut-out: 90.616,30.469 102.78,30.469 102.78,67.145 90.616,67.145

## Silkscreen, mask and mechanical layers (free items; w line width, h text height)
Top Overlay:
  circle w0.1: c49.189,51.361 r1.478
  circle w0.1: c81.389,17.941 r1.3
  circle w0.1: c36.189,78.861 r1.75
  circle w0.1: c36.189,64.511 r1.75
  circle w0.1: c36.189,51.361 r1.75
  circle w0.1: c36.189,38.211 r1.75
  circle w0.1: c36.189,25.261 r1.478
  circle w0.1: c14.989,17.091 r1.3
  circle w0.1: c14.989,13.591 r0.75
  circle w0.1: c4.439,90.691 r1.3
  lines w0.1: -1.002,32.791 12.698,32.791 ; -1.002,33.291 12.698,33.291 ; -0.311,32.791 -0.311,45.991 13.407,45.991 13.407,32.78 ; -0.311,45.491 13.389,45.491 ; -0.011,18.891 -0.011,20.641 ; -0.011,49.841 -1.711,49.841 -1.711,54.841 -0.011,54.841 ; -0.011,59.691 25.889,59.691 25.889,85.591 -0.011,85.591 ; 0,34.874 6.8,34.874 6.8,36.045 6.1,36.745 6.1,41.945 6.8,42.645 6.8,43.815 0,43.815 ; 0,35.53 0,44.47 ; 0,36.144 6.7,36.144 ; 0,42.545 6.7,42.545 ; 0,63.221 8.559,63.221 ; 0,71.569 0,62.921 9.35,62.921 ; 5.4,20.641 -1.6,20.641 -1.6,29.641 5.4,29.641 ; 5.4,34.815 -1.6,34.815 -1.6,43.815 5.4,43.815 ; 5.4,77.371 12.3,77.371 ; 5.4,77.671 12.3,77.671 ; 6.1,36.945 6.65,36.945 6.65,36.345 6.5,36.345 ; 6.1,37.545 6.65,37.545 6.65,38.145 6.1,38.145 ; 6.1,38.545 6.65,38.545 6.65,39.145 6.1,39.145 ; 6.1,39.545 6.65,39.545 6.65,40.145 6.1,40.145 ; 6.1,40.545 6.65,40.545 6.65,41.145 6.1,41.145 ; 6.1,41.745 6.65,41.745 6.65,42.345 6.5,42.345 ; 24.875,50.891 ccw(c23.189,51.361) 24.939,51.361 ; 81.115,12.128 81.575,11.331 ; 81.575,14.255 81.575,11.331 ; 82.032,12.122 81.575,11.331 ; 20.189,48.361 20.189,54.361 26.189,54.361 26.189,48.361 20.189,48.361 ; 33.189,22.261 33.189,28.261 39.189,28.261 39.189,22.261 33.189,22.261 ; 33.189,35.211 33.189,41.211 39.189,41.211 39.189,35.211 33.189,35.211 ; 33.189,48.361 33.189,54.361 39.189,54.361 39.189,48.361 33.189,48.361 ; 33.189,61.511 33.189,67.511 39.189,67.511 39.189,61.511 33.189,61.511 ; 33.189,75.861 33.189,81.861 39.189,81.861 39.189,75.861 33.189,75.861 ; 46.189,48.361 52.189,48.361 52.189,54.361 46.189,54.361 46.189,48.361
  text "MIC" at 59.271,91.22 h2
  text "SPK" at 47.696,91.006 h2
  text "P" at 46.803,83.099 h2
  text "N" at 56.811,83.085 h2
  text "N" at 54.371,82.873 h2
  text "P" at 63.651,82.555 h2
  text "ON/OFF" at 33.277,73.8 h2
  text "GQ_XC001 V1.0 / 20260519" at 55.616,63.623 h2
  text "↑" at 35.195,59.06 h3
  text "RST" at 6.124,50.962 h2 r90
  text "↑" at 48.191,48.045 h3 r270
  text "OK" at 35.048,46.289 h2
  text "↑" at 24.068,45.857 h3 r90
  text "3V3" at 27.374,36.683 h2
  text "↑" at 37.201,34.954 h3 r180
  text "1V15" at 28.675,30.961 h2 r270
  text "MEUN" at 40.794,23.462 h2 r90
  text "9V6" at 32.144,21.75 h2 r90
  text "1" at 95.126,11.254 h1
  text "4V2" at 64.117,8.349 h2 r270
  text "-6V" at 54.424,8.183 h2
  text "B-" at 9.626,7.916 h2
  text "B+" at 13.588,7.131 h2
  text "18V" at 58.552,2.401 h2
  text "VH" at 45.47,0.589 h2
Bottom Overlay:
  lines w0.1: 67.58,4.3 67.58,10.8 96.58,10.8 96.58,4.3
  text "ON/OFF" at 39.184,78.343 h2
  text "SD" at 3.811,72.622 h2 r90
  text "↑" at 37.334,63.568 h3
  text "↑" at 24.068,52.429 h3 r90
  text "RST" at 5.09,50.919 h2 r270
  text "OK" at 37.221,50.807 h2
  text "↑" at 48.273,50.526 h3 r270
  text "USB" at 3.441,40.543 h2 r90
  text "↑" at 35.058,38.965 h3 r180
  text "3V3" at 76.574,32.233 h2
  text "GND" at 86.165,31.656 h2 r90
  text "PA9" at 81.233,31.483 h2 r90
  text "PA10" at 83.77,31.462 h2 r90
  text "PC7" at 78.654,27.667 h2 r90
  text "PC6" at 75.356,27.151 h2 r90
  text "MEUN" at 38.153,24.607 h2
  text "LCD" at 83.205,11.98 h2
  text "50" at 69.532,11.351 h1
  text "1" at 95.41,11.339 h1